# Altium PCB Right_PCB.PcbDoc
Units mm, origin at the board's own origin, x right, y up, seen from the top; angles counter-clockwise.
Board outline 207.64 x 284.48 mm, 2 copper layers (Top Layer, Bottom Layer); 88 components, 91 nets, 314 pads, 0 vias.
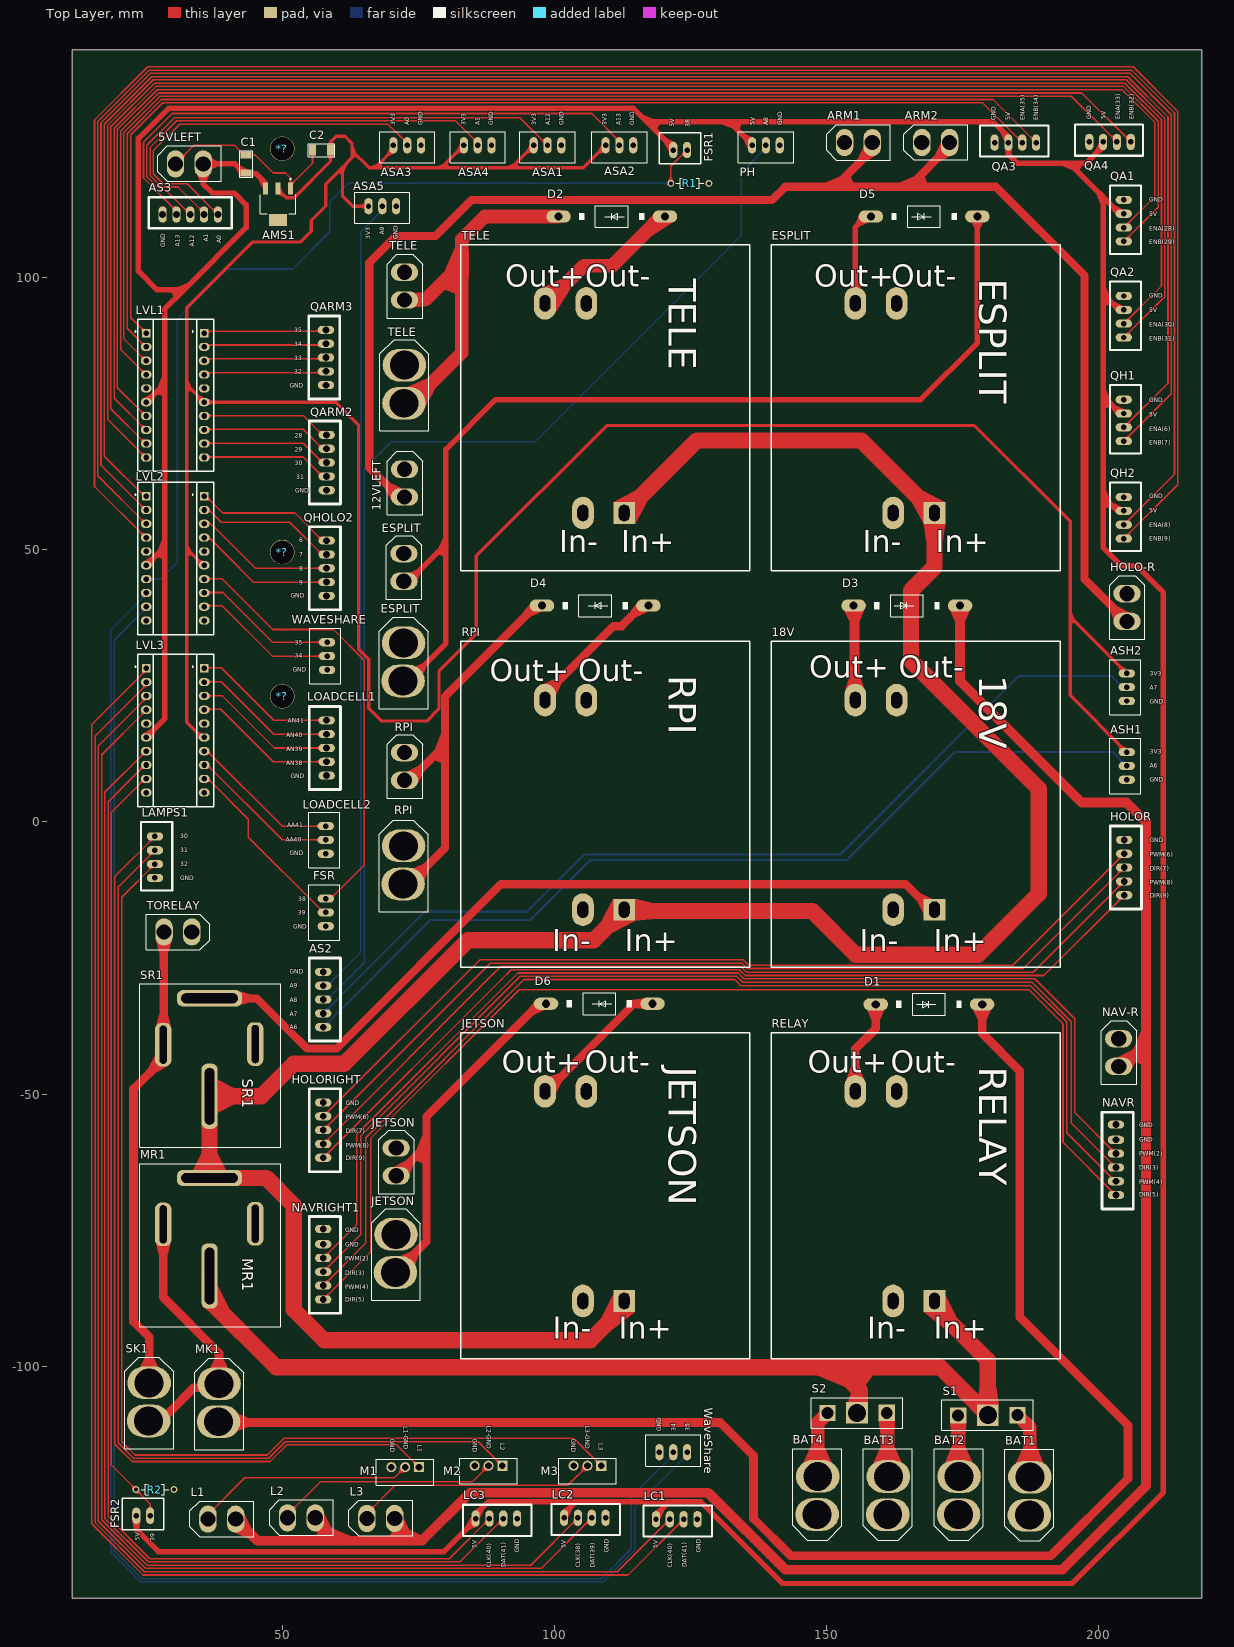
[diagram p0: Top Layer view]
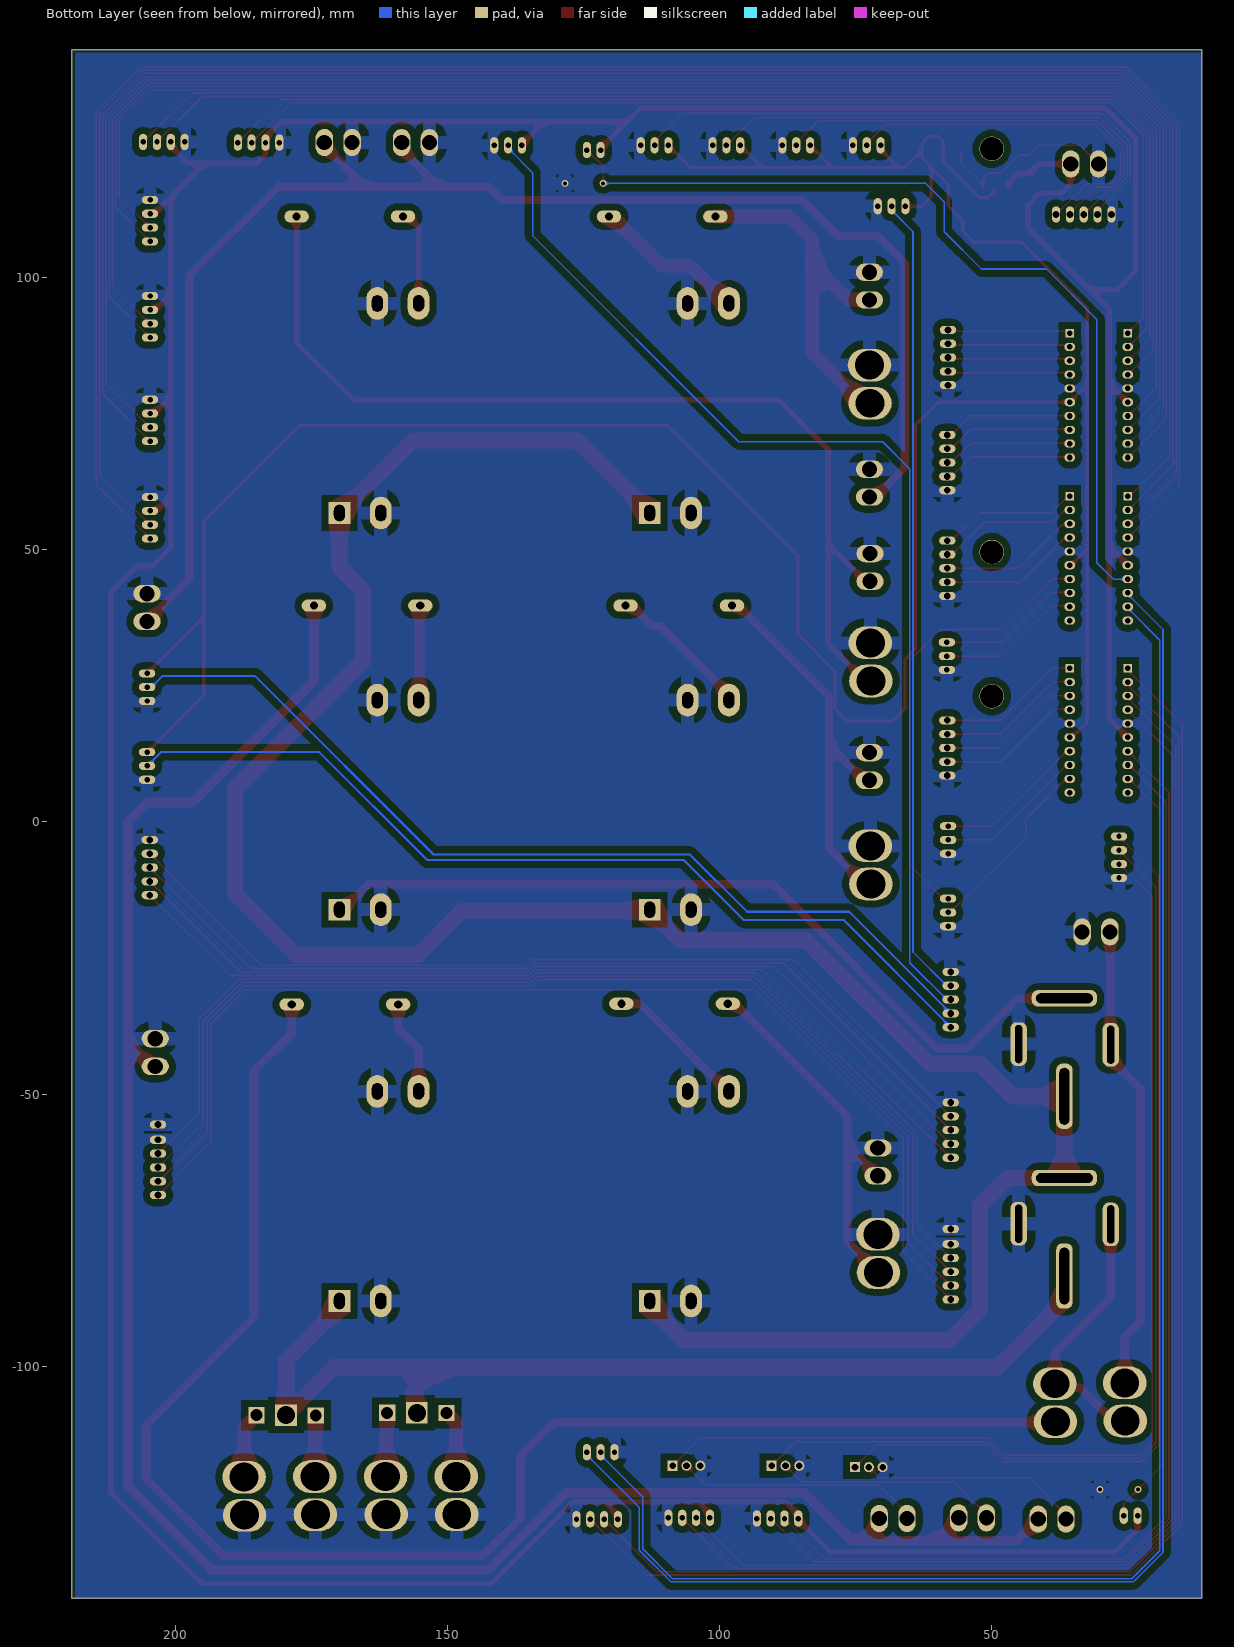
[diagram p1: Bottom Layer view, seen from below]

## Layer stack, top to bottom
Top Solder: solder mask 0.0102, Solder Resist, Dk 3.5
Top Layer: signal copper 0.0356
Dielectric 1: dielectric 0.32, FR-4, Dk 4.8
Bottom Layer: signal copper 0.0356
Bottom Solder: solder mask 0.0102, Solder Resist, Dk 3.5

## Board outline
11.303,-142.621 218.948,-142.621 218.948,141.859 11.303,141.859

## Design rules (kind name [scope] priority, off if disabled: settings)
Clearance Clearance_2 [InNet('GND') vs InComponent('LS*') or InComponent('C*') or InComponent('J1')or InComponent('J2') or InComponent('J3') or InComponent('J5') or InComponent('J6') or InComponent('U3') or InComponent('XT33') or InComponent('B2') or InComponent('R3') or InComponent('R5') OR InComponent('0')] p1: gap=1 ignorepadtopadclearanceinfootprint=FALSE
Clearance [All vs InNet('GND')] p2: gap=1.25 ignorepadtopadclearanceinfootprint=FALSE
Clearance Clearance_1 [All] p3: gap=0.3 ignorepadtopadclearanceinfootprint=FALSE
Height [All] p1: minheight=0 maxheight=50 prefheight=12.7
HoleSize [All] p1: absolutevalues=TRUE maxlimit=30 minlimit=0.025 maxpercent=80.000 minpercent=20.000
PolygonConnect [InNet('GND')] p1: connectstyle=Relief reliefconductorwidth=2.5 reliefentries=4 polygonreliefangle="90 Angle" airgapwidth=1.5
RoutingVias [All] p1: holewidth=0.711 width=1.27 viastyle="Through Hole" minholewidth=0.711 minwidth=1.27 maxholewidth=0.711 maxwidth=1.27
SolderMaskExpansion [All] p1: expansion=0.102 istentingtop=FALSE
Width [All] p1: maxlimit=6 minlimit=0.254 preferedwidth=0.3 minimp=50.000000 maximp=50.000000 favimp=50.000000
28 further rules are at their usual default settings.

## Components (designator, comment, footprint, x,y, rotation, side; value= is the part's Value field where it differs from the comment)
5VLEFT "XT30" XT30_FEMALE 32.512,120.523 r180 top
12VLEFT "XT30" XT30_FEMALE 72.009,62.611 r90 top
18V "BUCK" BUCKY 162.293,-54.719 r270 top
*? "HOLE" HOLE#1 50.038,123.825 r0 top
*? "HOLE" HOLE#2 43.053,61.468 r0 top
*? "HOLE" HOLE#3 48.768,51.181 r0 top
? "XT30" XT30_FEMALE 71.882,47.117 r90 top
AMS1 "AMS1117" AMS1117 46.644,119.217 r180 top
ARM1 "XT30" XT30_FEMALE 155.469,124.441 r180 top
ARM2 "XT30" XT30_FEMALE 169.672,124.46 r180 top
AS2 "JST5P" JST5P 57.585,-31.75 r90 top
AS3 "JST5P" JST5P 32.131,111.76 r180 top
ASA1 "JST3P" JST3P 98.552,124.079 r90 top
ASA2 "JST3P" JST3P 111.76,124.079 r90 top
ASA3 "JST3P" JST3P 72.771,124.079 r90 top
ASA4 "JST3P" JST3P 85.725,124.079 r90 top
ASA5 "JST3P" JST3P 68.199,112.903 r90 top
ASH1 "JST3P" JST3P 204.887,10.414 r0 top
ASH2 "JST3P" JST3P 204.887,24.892 r0 top
BAT1 "XT60" XT60_FEMALE 185.525,-128.496 r180 top
BAT2 "XT60" XT60_FEMALE 172.52,-128.397 r180 top
BAT3 "XT60" XT60_FEMALE 159.514,-128.397 r180 top
BAT4 "XT60" XT60_FEMALE 146.536,-128.369 r180 top
C1 "CERAMIC-4.7UF-50V-10%-X5R(1206)" C1206 43.307,120.904 r90 top
C2 "CERAMIC-4.7UF-50V-10%-X5R(1206)" C1206 57.15,123.444 r180 top
D1 "1N5400" DO201-15 168.783,-33.528 r0 top
D2 "1N5400" DO201-15 110.49,111.252 r180 top
D3 "1N5400" DO201-15 164.719,39.751 r0 top
D4 "1N5400" DO201-15 107.442,39.751 r180 top
D5 "1N5400" DO201-15 167.894,111.252 r0 top
D6 "1N5400" DO201-15 108.204,-33.401 r180 top
ESPLIT "BUCK" BUCKY 162.293,18.179 r270 top
ESPLIT "XT60" XT60_FEMALE 73.936,34.008 r0 top
FSR "JST3P" JST3P 57.689,-16.51 r0 top
FSR1 "JST2P" JST2P 122.428,124.231 r180 top
FSR2 "JST2P" JST2P 23.749,-126.746 r180 top
HOLO-R "XT30" XT30_FEMALE 204.766,39.751 r90 top
HOLOR "JST5P" JST5P 204.783,-7.493 r90 top
HOLORIGHT "JST5P" JST5P 57.585,-55.753 r90 top
JETSON "BUCK" BUCKY 105.27,-126.625 r270 top
JETSON "XT60" XT60_FEMALE 72.539,-74.704 r0 top (schematic designator JET)
L1 "XT30" XT30_FEMALE 38.481,-128.524 r180 top
L2 "XT30" XT30_FEMALE 53.107,-128.289 r180 top
L3 "XT30" XT30_FEMALE 67.691,-128.397 r180 top
LAMPS1 "JST4P" JST4P 26.543,-6.35 r0 top
LC1 "JST4P" JST4P 122.555,-128.143 r270 top
LC2 "JST4P" JST4P 105.664,-127.889 r270 top
LC3 "JST4P" JST4P 89.408,-128.016 r270 top
LOADCELL1 "JST5P" JST5P 57.966,12.7 r270 top (schematic designator LOADCELL2)
LOADCELL2 "JST3P" JST3P 57.689,-3.175 r0 top (schematic designator LOADCELL1)
LVL1 "LEVEL_SHIFTER" LEVEL_SHIFTER 23.241,64.262 r90 top
LVL2 "LEVEL_SHIFTER" LEVEL_SHIFTER 23.241,34.29 r90 top
LVL3 "LEVEL_SHIFTER" LEVEL_SHIFTER 23.241,2.667 r90 top
M1 "IRF3205" IRF3205 72.517,-119.507 r180 top
M2 "IRF3205" IRF3205 87.835,-119.253 r180 top
M3 "IRF3205" IRF3205 106.017,-119.253 r180 top
MK1 "XT60" XT60_FEMALE 40.027,-102.136 r0 top
MR1 "MAIN RELAY" RELAY 36.576,-77.199 r180 top
NAV-R "XT30" XT30_FEMALE 203.242,-42.037 r90 top
NAVR "JST6P" JST6P 203.259,-62.611 r90 top
NAVRIGHT1 "JST6P" JST6P 57.585,-81.788 r90 top (schematic designator "NAV RIGHT1")
PH "JST3P" JST3P 138.684,124.079 r90 top
QA1 "JST4P" JST4P 204.597,110.617 r0 top
QA2 "JST4P" JST4P 204.597,92.964 r0 top
QA3 "JST4P" JST4P 184.531,124.841 r90 top
QA4 "JST4P" JST4P 201.93,124.968 r90 top
QARM2 "JST5P" JST5P 57.966,65.151 r270 top
QARM3 "JST5P" JST5P 57.839,84.455 r270 top
QH1 "JST4P" JST4P 204.597,73.914 r0 top
QH2 "JST4P" JST4P 204.597,56.007 r0 top
QHOLO2 "JST5P" JST5P 57.966,45.72 r270 top
R1 "3-1623927-1" RESAD700W45L350D185 124.841,117.348 r0 top
R2 "3-1623927-1" RESAD700W45L350D185 26.543,-122.682 r0 top
RELAY "BUCK" BUCKY 162.293,-126.625 r270 top
RPI "XT60" XT60_FEMALE 73.936,-3.302 r0 top
RPI "BUCK" BUCKY 105.27,-54.719 r270 top
S1 "Schottky" "SCHOTTKY DIODE" 179.451,-109.093 r90 top
S2 "Schottky" "SCHOTTKY DIODE" 155.425,-108.658 r90 top
SK1 "XT60" XT60_FEMALE 27.178,-101.981 r0 top
SR1 "SUDO RELAY" RELAY 36.576,-44.179 r180 top
TELE "XT60" XT60_FEMALE 74.09,85.047 r0 top
TELE "BUCK" BUCKY 105.27,18.179 r270 top
TORELAY "XT30" XT30_FEMALE 31.115,-19.812 r0 top
WaveShare "JST3P" JST3P 121.92,-115.57 r270 top (schematic designator WS)
WAVESHARE "JST3P" JST3P 57.912,30.607 r0 top
? "XT30" XT30_FEMALE 72.009,10.541 r90 top
? "XT30" XT30_FEMALE 72.009,98.806 r90 top
? "XT30" XT30_FEMALE 70.466,-62.124 r90 top

## Footprints (in the part's own frame and the unit in brackets; to place one, negate y for a bottom-side part, rotate by r counter-clockwise, add the part's x,y. Pads: shape width x height; smd on the part's side, far side on the other; paste and mask are expansions set on the pad)
AMS1117 [mm]
  rect 0.95x2.15 smd: 1(-4.805,2.8) 2(-2.505,2.8) 3(-0.205,2.8)
  rect 3.25x2.15 smd: 4(-2.505,8.6)
  silkscreen extent -5.75,1 0.75,7.45, body extent -5.76,2.2 0.74,9.2, height 1.8
BUCKY [mm]
  rect 4x4 hole 3 slot 2 at 90 deg: 1(-38.59,7.506)
  oval 6x4 hole 3 slot 2 at 90 deg: 2(-38.59,-0.089) 3(-77.095,0.546) 4(-77.12,-7.049)
  silkscreen extent -87.91,-22.52 -27.97,30.57, body extent -87.75,-22.45 -27.75,30.55, height 26.51
C1206 [mil]
  rect 50x80 smd: 1(-65,0) 2(65,0)
  silkscreen extent -97,-48 97,48, body extent -63,-31 63,31, height 71
DO201-15 [mil]
  oval 177x88.5 hole 59: A(-385,0) C(385,0)
  silkscreen extent -235,-79 235,79, body extent -408,-104 408,104, height 209
HOLE#1 [mm]
  round 4.5 hole 4.3: 1(-0.127,-0.127)
HOLE#2 [mm]
  round 4.5 hole 4.3: 1(6.858,-11.878)
HOLE#3 [mm]
  round 4.5 hole 4.3: 1(1.143,-28.067)
IRF3205 [mm]
  rect 1.85x1.85 / inner round 1.85 / far side rect 1.85x1.85 hole 1.23: 1(-2.54,-0.94)
  round 1.85 hole 1.23: 2(0,-0.94) 3(2.54,-0.94)
  silkscreen extent -5.27,-2.35 5.27,2.35, body extent -5.15,-3.18 5.15,0.12, height 15.21
JST2P [mm]
  oval 1.5x3 hole 1: 1(0.635,0.762) 2(-1.905,0.762)
  silkscreen extent -4.45,-2.41 3.18,3.3, body extent -4.41,-2.4 3.14,3.3, height 7.01
JST3P [mm]
  oval 3x1.5 hole 1: 1(0.254,2.413) 2(0.254,-0.127) 3(0.254,-2.667)
  silkscreen extent -2.92,-5.21 2.79,4.95, body extent -2.9,-5.15 2.8,4.93, height 7
JST4P [mm]
  oval 3x1.5 hole 1: 1(0,3.683) 2(0,1.143) 3(0,-1.397) 4(0,-3.937)
  silkscreen extent -2.54,-6.22 3.17,6.35, body extent -2.55,-6.46 3.15,6.16, height 7
JST5P [mm]
  oval 1.5x3 hole 1.25: 1(-5.969,0.127) 2(-3.429,0.127) 3(-0.889,0.127) 4(1.651,0.127) 5(4.191,0.127)
  silkscreen extent -8.51,-3.05 6.73,2.67, body extent -8.49,-3.02 6.67,2.68, height 7
JST6P [mm]
  oval 1.5x3 hole 1.25 paste+0 mask+0.102: 1(-5.969,0.127)
  oval 1.5x3 hole 1.25: 2(-3.429,0.127) 3(-0.889,0.127) 4(1.651,0.127) 5(4.191,0.127) 6(6.985,0.127)
  silkscreen extent -8.51,-3.05 9.27,2.67, body extent -8.49,-3.02 9.21,2.68, height 7
LEVEL_SHIFTER [mm]
  oval 1.5x2 hole 1.02: GND(15.411,-12.349) GND(15.411,-1.699) HV(12.871,-1.699) HV1(2.711,-1.699) HV2(5.251,-1.699) HV3(7.791,-1.699) HV4(10.331,-1.699) HV5(17.951,-1.699) HV6(20.491,-1.699) HV7(23.031,-1.699) LV(12.871,-12.349) LV1(2.711,-12.349) LV2(5.251,-12.349) LV3(7.791,-12.349) LV4(10.331,-12.349) LV5(17.951,-12.349) LV6(20.491,-12.349) LV7(23.031,-12.349)
  rect 1.53x1.53 hole 1.02: HV8(25.571,-1.699) LV8(25.571,-12.349)
  silkscreen extent 0.14,-14.1 28.14,0.38, body extent 1.57,-13.52 26.97,-0.48, height 7.65
RELAY [mm]
  rrect75% 3x12 hole 1.8 slot 10.4 at 90 deg: 1(0,6.24)
  rrect75% 12x3 hole 1.8 slot 10.4 at 0 deg: 2(0,-11.76)
  rrect75% 3x8 hole 1.3 slot 7 at 90 deg: 3(8.52,-3.24) 4(-8.4,-3.36)
  silkscreen extent -13.08,-14.4 12.84,15.6, body extent -12.95,-14.39 12.95,15.51, height 40.91
RESAD700W45L350D185 [mm]
  round 1.258 hole 0.75: 1(-3.5,0) 2(3.5,0)
  silkscreen extent -2.55,-0.92 2.55,0.92, body extent -3.72,-0.92 3.72,0.92, height 1.84
"SCHOTTKY DIODE" [mm]
  rect 3x3 hole 2.2: 1(0.073,-5.6) 3(0.023,5.3)
  rect 4x4 hole 3.3: 2(0.073,-0.15)
  silkscreen extent -2.73,-8.5 2.87,8.3, body extent -2.46,-8.17 2.57,7.98, height 21.31
XT30_FEMALE [mm]
  oval 3.2x5 hole 2.8: 1(-2.9,-0.4) 2(2.2,-0.4)
  silkscreen extent -6.2,-3.7 5.5,2.8, body extent -5.79,-3.4 5.01,2.5, height 11.4
XT60_FEMALE [mm]
  oval 8x6 hole 5.3: 1(-1.8,-8.1) 2(-1.7,-1.1)
  silkscreen extent -6.2,-13.2 2.8,3.6, body extent -6.3,-13.1 3,3.4, height 17

## Part data
C1 C2: "4.7 ÂµF Â±10% 50V Ceramic Capacitor X5R 1206 (3216 Metric)", Package="SMD-2 Yageo", Check_prices=https://www.snapeda.com/parts/CC1206KKX5R9BB475/Yageo/view-part/?ref=eda, MF=Yageo, MP=CC1206KKX5R9BB475, SnapEDA_Link=https://www.snapeda.com/parts/CC1206KKX5R9BB475/Yageo/view-part/?ref=snap
D1 D2 D3 D4 D5 D6: "Diode Standard 50 V 3A Through Hole DO-201AD", Package="DO-201 Diodes Inc.", Check_prices=https://www.snapeda.com/parts/1N5400-T/Diodes+Inc./view-part/?ref=eda, MF="Diodes Inc.", MP=1N5400-T, SnapEDA_Link=https://www.snapeda.com/parts/1N5400-T/Diodes+Inc./view-part/?ref=snap
MR1 SR1: library part RELAY, "Power Relay SPDT 30A 24V", Manufacturer="TE Connectivity", Manufacturer Part Number=V23134A4064X551-EV-CBOX, Supplier Part Number 1=41-V23134A4064X551-EV-CBOX-ND, Pricing 1="1=21.98, 10=19.576, 25=18.6936, 50=18.0516, 110=17.34791, 330=16.41191, 550=15.99385 (USD)", RoHS=No, Stock 1=33, Supplier 1=Digikey
R1 R2: "1 MOhms Â±5% 0.25W, 1/4W Through Hole Resistor Axial - Carbon Film", Package=None, Check_prices=https://www.snapeda.com/parts/3-1623927-1/TE+Connectivity/view-part/?ref=eda, MF="TE Connectivity", MP=3-1623927-1, SnapEDA_Link=https://www.snapeda.com/parts/3-1623927-1/TE+Connectivity/view-part/?ref=snap

## Nets (pads, with @x,y where several pads share a name; then routed paths per layer and width w, separated by ;. In a path a pad name is that pad's centre, name@x,y a point inside that pad or via, vN(x,y) a via of type N, cw(c..) or ccw(c..) an arc to the next point about the centre after c; other vN are vias at no path point)
3V3: AMS1.2 ASA1.1 ASA2.1 ASA3.1 ASA4.1 ASA5.1 ASH1.1 ASH2.1 C2.1 LVL1.LV LVL2.LV LVL3.LV | length 553.6
  Top Layer w0.6: LVL3.LV 35.135,15.538 32.385,18.288 32.385,50.165 ; LVL2.LV 35.389,47.161 32.385,50.165 ; AMS1.2@49.149,116.198 50.666,114.681 52.112,114.681 58.801,121.37 C2.1 58.842,123.485 58.842,125.009 59.817,125.984 61.468,125.984 62.738,124.714 62.738,123.38 ; ASA5.1 62.865,113.157 61.023,114.998 61.023,120.332 ; ASA3.1@70.358,124.206 70.358,123.571 66.999,120.212 ; ASA4.1@82.896,123.411 ASA4.1@83.312,123.827 ; ASA4.1 79.191,120.212 ; ASA1.1 92.018,120.212 ; ASA2.1 105.226,120.212 92.018,120.212 ; ASH1.1 194.727,23.241 194.727,37.719 ; ASH2.1 194.727,37.719 ; 32.385,50.165 32.385,80.332 ; 32.385,80.332 32.385,94.488 44.45,106.553 53.213,106.553 55.245,108.585 55.245,110.52 57.912,113.187 57.912,117.221 61.023,120.332 ; 32.385,80.332 35.584,77.133 59.773,77.133 63.928,72.978 63.928,31.83 65.849,29.909 65.849,20.892 68.199,18.542 76.484,18.542 78.729,20.787 78.729,27.681 85.598,34.55 85.598,48.895 109.542,72.839 177.146,72.839 194.727,55.257 194.727,37.719 ; 61.023,120.332 62.738,122.047 62.738,123.38 ; 62.738,123.38 65.907,120.212 66.999,120.212 ; 66.999,120.212 79.191,120.212 ; 79.191,120.212 92.018,120.212
5.1V-I/P: D5.A ESPLIT.4 | length 17.7
  Top Layer w1: ESPLIT.4 155.245,109.287 157.209,111.252 D5.A
5.1V-O/P: ?.1@72.282,44.217 D5.C ESPLIT.1@72.136,25.908 | length 187.3
  Top Layer w1: ?.1@70.936,44.323 73.279,44.323 80.01,51.054 ; ESPLIT.1@72.136,25.908 73.136,25.908 80.01,32.782 80.01,51.054 ; D5.C 177.673,88.011 167.259,77.597 89.154,77.597 80.01,68.453 80.01,51.054
5V-I/P: D4.A RPI.4 | length 26.8
  Top Layer w1.5: RPI.4 98.222,23.401 110.789,35.969 112.315,35.969 116.097,39.751 D4.A
5V-O/P1: ?.1@72.409,7.641 D4.C RPI.1@72.136,-11.402 | length 73.2
  Top Layer w1.5: RPI.1@72.136,-11.402 73.241,-11.402 79.829,-4.814 79.829,14.17 ; ?.1@72.409,7.641 73.3,7.641 79.829,14.17 ; D4.C 96.539,39.751 79.829,23.041 79.829,14.17
5V-O/P2: 5VLEFT.1 AMS1.3 C1.1 FSR1.1 FSR2.1 LC1.4 LC2.4 LC3.4 LVL1.HV LVL2.HV LVL3.HV PH.1 QA1.2 QA2.2 QA3.2 QA4.2 QH1.2 QH2.2 | length 869.3
  Top Layer w1: FSR2.1 23.114,-130.048 27.178,-134.112 79.629,-134.112 84.879,-128.862 85.24,-128.862 85.567,-128.535 LC3.4@85.567,-127.92 ; LVL3.HV@24.892,15.494 28.321,18.923 28.321,50.546 ; LVL2.HV@24.892,47.117 28.321,50.546 ; LVL1.HV@24.892,77.089 28.321,80.518 ; AMS1.3@46.849,116.798 46.849,117.348 45.079,119.118 43.442,119.118 C1.1 42.926,119.253 41.256,120.923 5VLEFT.1 35.412,117.263 37.095,115.581 41.137,115.581 43.307,113.411 43.307,109.22 31.877,97.79 ; LC3.4 85.471,-127.266 87.767,-124.97 103.845,-124.97 121.037,-124.97 126.875,-124.97 141.859,-139.954 195.072,-139.954 211.836,-123.19 211.836,42.164 206.883,47.117 204.089,47.117 200.787,50.419 200.787,59.817 ; LC2.4 101.727,-127.139 103.845,-125.021 104.193,-125.021 ; LC1.4 118.618,-127.393 121.037,-124.974 ; FSR1.1 121.793,124.084 121.562,124.315 121.303,124.315 116.967,128.651 ; PH.1@136.271,124.46 132.08,128.651 ; QA4.2 200.787,124.206 197.612,121.031 194.564,121.031 ; QH2.2 204.501,57.246 203.358,57.246 200.787,59.817 ; QH1.2 203.962,75.057 200.787,78.232 ; QA2.2 203.712,94.107 203.462,94.357 203.458,94.357 200.787,97.028 ; QA1.2 204.501,111.856 203.751,111.856 201.434,114.173 201.422,114.173 200.787,114.808 ; 28.321,50.546 28.321,80.518 ; 28.321,80.518 28.321,94.234 31.877,97.79 ; 31.877,97.79 26.924,97.79 23.495,101.219 23.495,125.603 29.083,131.191 114.427,131.191 116.967,128.651 ; 116.967,128.651 132.08,128.651 ; 132.08,128.651 180.594,128.651 183.138,126.107 183.138,125.976 183.388,125.726 QA3.2 183.388,122.682 185.039,121.031 194.564,121.031 ; 194.564,121.031 200.787,114.808 ; 200.787,59.817 200.787,78.232 ; 200.787,78.232 200.787,97.028 ; 200.787,97.028 200.787,114.808
12V-O/P: 12VLEFT.1 ARM1.1 ARM2.1 HOLO-R.1 | length 279.4
  Top Layer w1.5: 12VLEFT.1 71.353,59.711 65.913,65.151 65.913,102.743 70.866,107.696 78.105,107.696 84.709,114.3 139.954,114.3 142.367,116.713 151.511,116.713 ; ARM1.1 158.369,123.571 151.511,116.713 ; ARM2.1 172.572,124.185 165.1,116.713 ; HOLO-R.1 197.358,44.659 197.358,100.457 181.102,116.713 165.1,116.713 ; 151.511,116.713 165.1,116.713
14V-I/P: D1.A RELAY.4 | length 17.5
  Top Layer w1.6: RELAY.4 155.245,-41.743 159.004,-37.984 D1.A
14V-O/P: D1.C MK1.1 | length 288.2
  Top Layer w1.6: MK1.1 38.354,-110.363 130.429,-110.363 136.525,-116.459 136.525,-128.016 143.383,-134.874 191.135,-134.874 205.359,-120.65 205.359,-110.871 185.483,-90.995 185.483,-45.783 178.562,-38.862 D1.C
18V-I/P: 18V.4 D3.A | length 17.3
  Top Layer w1.8: D3.A 155.092,39.599 18V.4@155.092,22.554
18V-O/P: D3.C L1.1 L2.1 L3.1 NAV-R.1 | length 383.8
  Top Layer w1.8: L1.1 45.337,-132.08 60.198,-132.08 ; L2.1 60.198,-132.08 ; L3.1 70.591,-128.897 73.774,-132.08 ; D3.C 174.498,25.908 196.85,3.556 205.105,3.556 208.661,0 208.661,-40.513 ; NAV-R.1 204.237,-44.937 208.661,-40.513 ; 60.198,-132.08 73.774,-132.08 ; 73.774,-132.08 75.645,-132.08 84.455,-123.27 128.223,-123.27 142.367,-137.414 193.303,-137.414 208.661,-122.056 208.661,-40.513
22V-I/P: D2.A TELE.4 | length 28.1
  Top Layer w2.5: TELE.4 98.222,95.893 98.915,96.586 99.761,96.586 105.41,102.235 110.617,102.235 119.271,110.889 D2.A@119.271,111.126
22V-O/P: ?.1@72.409,95.906 D2.C TELE.1@72.29,76.947 | length 68.1
  Top Layer w2.5: TELE.1@72.29,76.947 73.645,76.947 82.931,86.233 82.931,102.616 ; ?.1@72.409,95.906 72.543,96.04 76.355,96.04 82.931,102.616 ; D2.C 87.133,111.252 82.931,107.05 82.931,102.616
26I: LVL2.LV8 QHOLO2.1 | length 25.2
  Top Layer w0.254: QHOLO2.1@57.343,51.689 QHOLO2.1
  Top Layer w0.3: LVL2.LV8@36.322,59.69 36.322,59.442 38.992,56.772 52.26,56.772 QHOLO2.1@57.343,51.689
26O: LVL2.HV8 QH1.3 | length 334.4
  Top Layer w0.3: LVL2.HV8@24.892,59.563 17.237,67.218 17.237,128.229 25.971,136.963 205.302,136.963 212.703,129.562 212.703,80.623 QH1.3
27I: LVL2.LV7 QHOLO2.2 | length 26
  Top Layer w0.254: QHOLO2.2@57.277,49.149 QHOLO2.2
  Top Layer w0.3: LVL2.LV7@36.322,57.404 36.405,57.404 38.724,55.085 51.319,55.085 57.255,49.149 QHOLO2.2
27O: LVL2.HV7 QH1.4 | length 341.8
  Top Layer w0.3: LVL2.HV7@24.892,57.277 16.637,65.532 16.637,128.478 25.722,137.563 205.718,137.563 213.303,129.978 213.303,78.683 QH1.4
28I: LVL2.LV6 QHOLO2.3 | length 25.2
  Top Layer w0.3: LVL2.LV6@36.322,54.864 36.653,54.864 36.99,54.527 37.099,54.527 40.987,50.639 45.018,46.609 QHOLO2.3
28O: LVL2.HV6 QH2.3 | length 362.2
  Top Layer w0.3: LVL2.HV6@24.892,54.737 16.037,63.592 16.037,128.726 25.474,138.163 206.007,138.163 213.903,130.267 213.903,63.916 QH2.3
29I: LVL2.LV5 QHOLO2.4 | length 25.2
  Top Layer w0.3: LVL2.LV5@36.322,52.324 36.405,52.324 39.624,49.105 44.66,44.069 QHOLO2.4
29O: LVL2.HV5 QH2.4 | length 369.8
  Top Layer w0.3: LVL2.HV5@24.892,52.197 15.437,61.652 15.437,128.975 25.225,138.763 206.296,138.763 214.503,130.556 214.503,61.976 QH2.4
34I: LVL1.LV4 QARM2.1 | length 23.2
  Top Layer w0.3: LVL1.LV4@36.322,74.676 53.787,74.676 57.343,71.12 QARM2.1
34O: LVL1.HV4 QA1.3 | length 272.7
  Top Layer w0.3: LVL1.HV4@24.892,74.549 19.637,79.804 19.637,127.235 26.965,134.563 204.267,134.563 210.303,128.527 210.303,114.926 QA1.3
35I: LVL1.LV3 QARM2.2 | length 23.2
  Top Layer w0.3: LVL1.LV3@36.322,72.136 53.787,72.136 57.343,68.58 QARM2.2
35O: LVL1.HV3 QA1.4 | length 280.3
  Top Layer w0.3: LVL1.HV3@24.892,72.009 19.037,77.864 19.037,127.484 26.716,135.163 204.516,135.163 210.903,128.776 210.903,112.986 QA1.4
36I: LVL1.LV2 QARM2.3 | length 23.2
  Top Layer w0.3: LVL1.LV2@36.322,69.596 53.787,69.596 57.309,66.074 QARM2.3@58.059,66.074
36O: LVL1.HV2 QA2.3 | length 300.4
  Top Layer w0.3: LVL1.HV2@24.892,69.469 18.437,75.924 18.437,127.732 26.468,135.763 204.764,135.763 211.503,129.024 211.503,98.473 QA2.3
37I: LVL1.LV1 QARM2.4 | length 23.2
  Top Layer w0.3: LVL1.LV1@36.322,67.056 53.787,67.056 57.309,63.534 QARM2.4@58.059,63.534
37O: LVL1.HV1 QA2.4 | length 308
  Top Layer w0.3: LVL1.HV1@24.892,66.929 17.837,73.984 17.837,127.981 26.219,136.363 205.013,136.363 212.103,129.273 212.103,96.533 QA2.4
38I: LVL1.LV8 QARM3.1 | length 21.9
  Top Layer w0.3: LVL1.LV8@36.322,89.916 36.6,90.194 57.736,90.194 QARM3.1
38O: LVL1.HV8 QA3.3 | length 207.1
  Top Layer w0.3: LVL1.HV8@24.767,89.66 LVL1.HV8@24.892,89.535 ; LVL1.HV8 22.098,92.675 22.098,126.302 27.959,132.163 178.606,132.163 QA3.3
39I: LVL1.LV7 QARM3.2 | length 21.9
  Top Layer w0.3: LVL1.LV7@36.322,87.376 36.6,87.654 57.736,87.654 QARM3.2
39O: LVL1.HV7 QA3.4 | length 213.6
  Top Layer w0.3: LVL1.HV7@24.892,87.249 21.437,90.704 21.437,126.49 27.71,132.763 180.546,132.763 QA3.4
40I: LVL1.LV6 QARM3.3 | length 21.9
  Top Layer w0.3: LVL1.LV6@36.322,84.836 36.6,85.114 57.736,85.114 QARM3.3
40O: LVL1.HV6 QA4.3 | length 232.4
  Top Layer w0.3: LVL1.HV6@24.892,84.709 20.837,88.764 20.837,126.738 27.462,133.363 194.932,133.363 QA4.3
41I: LVL1.LV5 QARM3.4 | length 21.9
  Top Layer w0.3: LVL1.LV5@36.322,82.296 36.6,82.574 57.736,82.574 QARM3.4
41O: LVL1.HV5 QA4.4 | length 239
  Top Layer w0.3: LVL1.HV5@24.892,82.169 20.237,86.824 20.237,126.987 27.213,133.963 196.872,133.963 QA4.4
A0: AS3.1 ASA3.2 | length 69.8
  Top Layer w0.3: AS3.1 32.455,117.278 28.056,117.278 26.245,119.089 26.245,123.4 31.074,128.229 69.371,128.229 72.159,125.441 72.215,125.441 72.898,124.758 ASA3.2
A1: AS3.2 ASA4.2 | length 82.5
  Top Layer w0.3: AS3.2 35.56,111.887 30.769,116.678 27.808,116.678 25.645,118.841 25.645,123.943 30.531,128.829 81.781,128.829 85.852,124.758 ASA4.2
A4: AS2.1 ASH1.2 | length 169.7
  Bottom Layer w0.4: AS2.1 77.143,-18.034 95.504,-18.034 106.553,-6.985 153.67,-6.985 173.482,12.827 202.601,12.827 ASH1.2
A5: AS2.2 ASH2.2 | length 174.2
  Bottom Layer w0.4: AS2.2 76.127,-16.51 94.869,-16.51 105.41,-5.969 152.527,-5.969 185.293,26.797 202.36,26.797 204.392,24.765 ASH2.2
A10: AS2.3 PH.2 | length 206.6
  Bottom Layer w0.3: AS2.3 58.208,-32.639 64.989,-25.858 64.989,64.862 69.977,69.85 96.393,69.85 134.303,107.76 134.303,119.326 138.811,123.834 PH.2
A11: AS2.4 ASA5.2 | length 148.2
  Bottom Layer w0.3: AS2.4 58.208,-30.099 64.389,-23.918 64.389,108.47 68.326,112.407 ASA5.2
A12: AS3.3 ASA1.2 | length 94.5
  Top Layer w0.3: AS3.3 28.575,116.078 27.559,116.078 25.045,118.592 25.045,124.359 30.118,129.432 93.58,129.432 ASA1.2
A13: AS3.4 ASA2.2 | length 108.3
  Top Layer w0.3: AS3.4 30.48,112.308 24.445,118.343 24.445,124.902 29.718,130.175 106.795,130.175 111.887,125.083 ASA2.2
A38I: FSR.1 LVL2.LV4 | length 82.1
  Top Layer w0.3: LVL2.LV4@36.322,44.704 38.862,44.704 48.207,35.359 59.338,35.359 64.989,29.708 64.989,-7.909 58.801,-14.097 FSR.1 ; FSR.1@58.547,-14.732 FSR.1@58.562,-14.717
A38O: FSR1.2 LVL2.HV4 R1.1 | length 163.4
  Top Layer w0.3: R1.1 121.341,120.477 FSR1.2
  Bottom Layer w0.3: LVL2.HV4@24.892,44.577 LVL2.HV4@24.938,44.623 ; LVL2.HV4 24.984,44.577 27.559,44.577 30.607,47.625 30.607,92.329 39.878,101.6 51.816,101.6 58.674,108.458 58.674,113.919 62.103,117.348 R1.1
A39I: FSR.2 LVL3.LV2 | length 33.8
  Top Layer w0.254: LVL3.LV2@36.322,7.874 LVL3.LV2@36.322,8.001
  Top Layer w0.3: LVL3.LV2@36.322,7.874 43.688,0.508 43.688,-2.794 56.813,-15.919 56.813,-15.933 57.518,-16.637 FSR.2
A39O: FSR2.2 LVL3.HV2 R2.1 | length 141.1
  Top Layer w0.3: LVL3.HV2@24.892,7.874 24.646,7.874 18.542,1.77 18.542,-118.181 R2.1 23.043,-122.738 25.654,-125.349 FSR2.2
BAT5: BAT1.1 S1.1 | length 12.3
  Top Layer w2.5: S1.1 187.325,-111.294 BAT1.1
BAT6: BAT2.1 S1.3 | length 11.3
  Top Layer w2.5: S1.3 174.235,-109.154 174.235,-120.213 BAT2.1
BAT7: BAT3.1 S2.1 | length 11.8
  Top Layer w2.5: S2.1 161.17,-108.73 161.17,-120.152 BAT3.1
BAT8: BAT4.1 S2.3 | length 11.2
  Top Layer w2.5: BAT4.1@148.309,-119.095 148.309,-110.451 S2.3
D2: MR1.1 RELAY.1 S1.2 S2.2 | length 190
  Top Layer w3: MR1.1 36.576,-87.939 48.84,-100.203 151.785,-100.203 ; S2.2 156.075,-108.085 156.075,-104.493 151.785,-100.203 ; RELAY.1@170.254,-89.57 179.601,-98.917 S1.2 177.451,-106.87 177.451,-106.824 170.83,-100.203 151.785,-100.203
DH(34): HOLOR.3 HOLORIGHT.3 | length 168
  Top Layer w0.3: HOLORIGHT.3 86.668,-27.432 88.144,-25.956 134.424,-25.956 135.402,-26.934 186.105,-26.934 HOLOR.3
DH(37): HOLOR.1 HOLORIGHT.1 | length 168.1
  Top Layer w0.3: HOLORIGHT.1 90.224,-28.956 92.024,-27.156 133.927,-27.156 135,-28.229 189.889,-28.229 HOLOR.1
DN(15): NAVR.3 NAVRIGHT1.3 | length 204.2
  Top Layer w0.3: NAVRIGHT1.3 64.389,-75.746 64.389,-57.658 93.691,-28.356 133.43,-28.356 134.538,-29.464 187.706,-29.464 194.945,-36.703 194.945,-55.313 NAVR.3
DN(23): NAVR.1 NAVRIGHT1.1 | length 209.9
  Top Layer w0.3: NAVRIGHT1.1 66.167,-79.048 66.167,-58.166 93.507,-30.826 187.163,-30.826 193.421,-37.084 193.421,-58.869 NAVR.1
GND: 5VLEFT.2 12VLEFT.2 18V.2 18V.3 ?.2 AMS1.1 ARM1.2 ARM2.2 AS2.5 AS3.5 ASA1.3 ASA2.3 ASA3.3 ASA4.3 ASA5.3 ASH1.3 ASH2.3 BAT1.2 BAT2.2 BAT3.2 BAT4.2 C1.2 C2.2 ESPLIT.2 ESPLIT.3 FSR.3 HOLO-R.2 HOLOR.5 HOLORIGHT.5 JETSON.2 JETSON.3 LAMPS1.4 LC1.1 LC2.1 LC3.1 LOADCELL1.5 LOADCELL2.3 LVL1.GND LVL2.GND LVL3.GND M1.3 M2.3 M3.3 MR1.4 NAV-R.2 NAVR.5 NAVR.6 NAVRIGHT1.5 NAVRIGHT1.6 PH.3 QA1.1 QA2.1 QA3.1 QA4.1 QARM2.5 QARM3.5 QH1.1 QH2.1 QHOLO2.5 R1.2 R2.2 RELAY.2 RELAY.3 RPI.2 RPI.3 SR1.4 TELE.2 TELE.3 TORELAY.2 WaveShare.3 WAVESHARE.3 | length 35.1
  Top Layer w0.3: 5VLEFT.2 33.722,124.333 41.148,124.333 42.926,122.555 C1.2 44.958,122.555 48.26,119.253 50.546,119.253 51.449,118.35 AMS1.1@51.449,117.017 ; AMS1.1 AMS1.1@51.449,117.017 ; C2.2 55.499,121.067 AMS1.1@51.449,117.017
JETSON: ?.1@70.866,-65.024 D6.C JETSON.1@70.739,-82.804 | length 69.6
  Top Layer w1.5: JETSON.1@70.739,-82.804 76.454,-77.089 76.454,-59.436 ; ?.1@70.866,-65.024 76.454,-59.436 ; D6.C@98.425,-33.274 97.301,-33.274 76.454,-54.121 76.454,-59.436
JETSON-I/P: D6.A JETSON.4 | length 26.2
  Top Layer w1.5: JETSON.4@98.475,-49.53 114.588,-33.417 117.84,-33.417 D6.A@117.983,-33.274
L1: LAMPS1.1 M1.1 | length 174.9
  Top Layer w0.3: LAMPS1.1 19.177,-10.033 19.177,-114.346 22.363,-117.532 47.695,-117.532 50.743,-114.484 70.974,-114.484 M1.1
L1-GND: L1.2 M1.2 | length 42.2
  Top Layer w0.3: L1.2@37.333,-127.072 L1.2 36.281,-127.295 43.053,-120.523 70.561,-120.523 M1.2
L2: LAMPS1.2 M2.1 | length 186.6
  Top Layer w0.3: LAMPS1.2 19.777,-11.973 19.777,-114.098 22.611,-116.932 47.446,-116.932 50.494,-113.884 85.945,-113.884 M2.1
L2-GND: L2.2 M2.2 | length 41.3
  Top Layer w0.3: L2.2 50.907,-127.274 56.896,-121.285 58.812,-121.285 84.862,-121.285 M2.2
L3: LAMPS1.3 M3.1 | length 201.2
  Top Layer w0.3: LAMPS1.3 20.447,-13.843 20.447,-113.919 22.86,-116.332 47.198,-116.332 50.246,-113.284 103.528,-113.284 M3.1
L3-GND: L3.2 M3.2 | length 45.1
  Top Layer w0.3: L3.2 65.491,-127.097 70.668,-121.92 102.41,-121.92 M3.2
LC1I: LOADCELL1.1 LVL3.LV8 | length 25.8
  Top Layer w0.3: LVL3.LV8@36.322,28.321 38.735,28.321 48.387,18.669 LOADCELL1.1
LC1O: LC1.2 LVL3.HV8 | length 278.2
  Top Layer w0.254: LVL3.HV8@24.892,27.857 LVL3.HV8@24.892,28.194
  Top Layer w0.3: LVL3.HV8@24.892,27.857 14.942,17.907 14.942,-128.988 24.336,-138.382 113.459,-138.382 LC1.2
LC2I: LOADCELL1.3 LVL3.LV6 | length 26.5
  Top Layer w0.3: LVL3.LV6 38.945,23.158 48.514,13.589 LOADCELL1.3
LC2O: LC2.2 LVL3.HV6 | length 253.3
  Top Layer w0.254: LVL3.HV6@24.892,22.72 LVL3.HV6@24.892,23.114
  Top Layer w0.3: LVL3.HV6@24.892,22.72 16.142,13.97 16.142,-128.491 24.833,-137.182 97.514,-137.182 LC2.2
LC3I: LOADCELL2.1 LVL3.LV4 | length 27.5
  Top Layer w0.254: LVL3.LV4@36.322,12.831 LVL3.LV4@36.322,13.081
  Top Layer w0.3: LVL3.LV4@36.322,12.831 49.915,-0.762 LOADCELL2.1
LC3O: LC3.2 LVL3.HV4 | length 223.9
  Top Layer w0.254: LVL3.HV4@24.835,12.954 LVL3.HV4@24.892,12.954
  Top Layer w0.3: LVL3.HV4@24.835,12.954 17.342,5.461 17.342,-127.994 25.33,-135.982 82.585,-135.982 LC3.2
M-SW: MK1.2 MR1.3 SK1.1 | length 49.3
  Top Layer w1.6: SK1.1 27.569,-110.081 29.183,-108.467 29.201,-108.467 33.661,-104.007 37.556,-104.007 MK1.2 38.327,-97.636 28.056,-87.365 MR1.3
MR-O/P: ESPLIT.1@169.799,56.769 JETSON.1@112.776,-88.035 MR1.2 RPI.1@112.776,-16.129 SR1.1 TELE.1@112.776,56.769 | length 440.8
  Top Layer w3: JETSON.1@112.215,-89.57 106.535,-95.25 57.658,-95.25 52.07,-89.662 52.07,-70.485 47.024,-65.439 MR1.2 SR1.1 46.101,-50.419 52.07,-44.45 61.341,-44.45 84.074,-21.717 107.188,-21.717 112.776,-16.129 113.03,-16.383 147.32,-16.383 155.321,-24.384 177.8,-24.384 188.976,-13.208 188.976,6.096 165.481,29.591 165.481,42.545 169.799,46.863 169.799,56.769 169.299,57.269 169.172,57.269 156.337,70.104 126.111,70.104 TELE.1@112.776,56.769
PH(33): HOLOR.4 HOLORIGHT.4 | length 168
  Top Layer w0.3: HOLORIGHT.4 86.204,-25.356 134.672,-25.356 135.65,-26.334 184.165,-26.334 HOLOR.4
PH(36): HOLOR.2 HOLORIGHT.2 | length 168.1
  Top Layer w0.3: HOLORIGHT.2 88.446,-28.194 90.084,-26.556 134.175,-26.556 135.248,-27.629 187.949,-27.629 HOLOR.2
PN(14): NAVR.4 NAVRIGHT1.4 | length 200.9
  Top Layer w0.3: NAVRIGHT1.4 63.627,-73.968 63.627,-57.404 93.275,-27.756 133.678,-27.756 134.751,-28.829 188.214,-28.829 195.58,-36.195 195.58,-53.408 NAVR.4
PN(22): NAVR.2 NAVRIGHT1.2 | length 207.7
  Top Layer w0.254: 65.256,-58.017 65.278,-58.039 ; NAVR.2@203.019,-66.04 NAVR.2
  Top Layer w0.3: NAVRIGHT1.2 65.278,-77.397 65.278,-58.039 ; 65.256,-58.017 94.317,-28.956 133.096,-28.956 134.239,-30.099 187.452,-30.099 194.093,-36.739 194.093,-57.113 NAVR.2@203.019,-66.04
S-SW: SK1.2 SR1.3 TORELAY.1 | length 86.4
  Top Layer w1.6: SK1.2 25.478,-94.671 22.606,-91.799 22.606,-49.065 28.056,-43.615 SR1.3 28.136,-40.859 28.136,-20.291 TORELAY.1
SCK1I: LOADCELL1.2 LVL3.LV7 | length 25.8
  Top Layer w0.3: LVL3.LV7@36.322,25.781 38.735,25.781 48.387,16.129 LOADCELL1.2
SCK1O: LC1.3 LVL3.HV7 | length 271.6
  Top Layer w0.254: LVL3.HV7@24.892,25.098 LVL3.HV7@24.892,25.654
  Top Layer w0.3: LVL3.HV7@24.892,25.098 15.542,15.748 15.542,-128.739 24.585,-137.782 111.519,-137.782 LC1.3
SCK2I: LOADCELL1.4 LVL3.LV5 | length 25.8
  Top Layer w0.3: LVL3.LV5@36.322,20.701 38.608,20.701 48.26,11.049 LOADCELL1.4
SCK2O: LC2.3 LVL3.HV5 | length 246.8
  Top Layer w0.254: LVL3.HV5@24.892,20.469 LVL3.HV5@24.892,20.574
  Top Layer w0.3: LVL3.HV5@24.892,20.469 16.742,12.319 16.742,-128.242 25.082,-136.582 95.574,-136.582 LC2.3
SCK3I: LOADCELL2.2 LVL3.LV3 | length 27.5
  Top Layer w0.254: LVL3.LV3@36.322,10.291 LVL3.LV3@36.322,10.541
  Top Layer w0.3: LVL3.LV3@36.322,10.291 49.915,-3.302 LOADCELL2.2
SCK3O: LC3.3 LVL3.HV3 | length 217.5
  Top Layer w0.3: LVL3.HV3@24.892,10.414 24.646,10.414 17.942,3.71 17.942,-127.745 25.579,-135.382 80.645,-135.382 LC3.3
SR-O/P: 18V.1 SR1.2 | length 151.3
  Top Layer w1.5: SR1.2 45.246,-32.419 50.927,-38.1 54.483,-41.656 59.944,-41.656 90.16,-11.44 164.496,-11.44 18V.1@169.492,-16.436
WS34I: LVL2.LV2 WAVESHARE.2 | length 25.7
  Top Layer w0.254: LVL2.LV2@36.322,39.624 LVL2.LV2@36.449,39.751
  Top Layer w0.3: LVL2.LV2@36.449,39.751 38.862,39.751 48.133,30.48 WAVESHARE.2
WS34O: LVL2.HV2 WaveShare.2 | length 296.2
  Bottom Layer w0.3: LVL2.HV2@24.892,39.497 24.892,39.247 19.05,33.405 19.05,-133.945 24.17,-139.065 108.585,-139.065 114.081,-133.569 114.081,-124.044 121.793,-116.332 WaveShare.2
WS35I: LVL2.LV3 WAVESHARE.1 | length 25.6
  Top Layer w0.3: LVL2.LV3@36.322,42.164 38.989,42.164 48.133,33.02 WAVESHARE.1
WS35O: LVL2.HV3 WaveShare.1 | length 301.8
  Bottom Layer w0.3: LVL2.HV3@24.892,42.037 24.892,41.787 18.45,35.345 18.45,-134.193 23.922,-139.665 108.834,-139.665 114.681,-133.818 114.681,-125.984 124.333,-116.332 WaveShare.1
pads on no net: *?.1 AMS1.4 LVL2.HV1 LVL2.LV1 LVL3.HV1 LVL3.LV1

## Polygon pours and split planes (outlines as drawn)
no net on Mechanical 16 (solid): 500.253,-44.196
no net on Mechanical 16 (solid): 108.458,122.555
GND on Bottom Layer "GND_L02_P000" (solid, remove dead copper, pour order 0): 11.294,141.351 218.313,141.351 218.313,-142.612 217.678,-142.621 11.294,-142.612

## Silkscreen, mask and mechanical layers (free items; w line width, h text height)
Top Overlay:
  text "GND" at 198.585,129.108 h0.8 r90
  text "5V" at 201.252,129.108 h0.8 r90
  text "ENA(33)" at 203.919,129.108 h0.8 r90
  text "ENB(32)" at 206.431,129.108 h0.8 r90
  text "GND" at 181.059,128.981 h0.8 r90
  text "5V" at 183.726,128.981 h0.8 r90
  text "ENA(35)" at 186.393,128.981 h0.8 r90
  text "ENB(34)" at 188.905,128.981 h0.8 r90
  text "3V3" at 70.696,128.059 h0.8 r90
  text "A0" at 73.236,128.059 h0.8 r90
  text "GND" at 75.776,128.059 h0.8 r90
  text "3V3" at 83.65,128.059 h0.8 r90
  text "A1" at 86.19,128.059 h0.8 r90
  text "GND" at 88.73,128.059 h0.8 r90
  text "3V3" at 96.604,128.059 h0.8 r90
  text "A12" at 99.144,128.059 h0.8 r90
  text "GND" at 101.684,128.059 h0.8 r90
  text "3V3" at 109.558,128.059 h0.8 r90
  text "A13" at 112.098,128.059 h0.8 r90
  text "GND" at 114.638,128.059 h0.8 r90
  text "5V" at 136.736,128.059 h0.8 r90
  text "A8" at 139.276,128.059 h0.8 r90
  text "GND" at 141.816,128.059 h0.8 r90
  text "5V" at 122.004,127.711 h0.8 r90
  text "38" at 124.798,127.678 h0.8 r90
  text "GND" at 209.245,113.962 h0.8
  text "5V" at 209.245,111.295 h0.8
  text "ENA(28)" at 209.245,108.628 h0.8
  text "A9" at 68.664,107.904 h0.8 r90
  text "3V3" at 66.124,107.104 h0.8 r90
  text "GND" at 71.204,107.104 h0.8 r90
  text "A1" at 36.343,106.646 h0.8 r90
  text "A0" at 38.692,106.38 h0.8 r90
  text "ENB(29)" at 209.245,106.116 h0.8
  text "A13" at 31.136,105.713 h0.8 r90
  text "A12" at 33.739,105.713 h0.8 r90
  text "GND" at 28.405,105.58 h0.8 r90
  text "TELE" at 69.596,105.156 h1.52
  text "Out+" at 90.892,98.329 h4
  text "Out-" at 105.595,98.329 h4
  text "Out+" at 147.661,98.329 h4
  text "Out-" at 161.856,98.329 h4
  text "GND" at 209.245,96.309 h0.8
  text "5V" at 209.245,93.642 h0.8
  text "ENA(30)" at 209.245,90.975 h0.8
  text "35" at 52.151,89.959 h0.8
  text "ENB(31)" at 209.245,88.463 h0.8
  text "34" at 52.151,87.419 h0.8
  text "33" at 52.151,84.879 h0.8
  text "32" at 52.151,82.339 h0.8
  text "GND" at 51.351,79.799 h0.8
  text "GND" at 209.245,77.132 h0.8
  text "5V" at 209.245,74.465 h0.8
  text "ENA(6)" at 209.245,71.798 h0.8
  text "28" at 52.278,70.61 h0.8
  text "ENB(7)" at 209.245,69.286 h0.8
  text "29" at 52.278,68.07 h0.8
  text "30" at 52.278,65.53 h0.8
  text "31" at 52.544,62.99 h0.8
  text "GND" at 52.367,60.495 h0.8
  text "GND" at 209.245,59.479 h0.8
  text "5V" at 209.245,56.812 h0.8
  text "ENA(8)" at 209.245,54.145 h0.8
  text "ESPLIT" at 68.199,53.213 h1.52
  text "ENB(9)" at 209.245,51.633 h0.8
  text "6" at 53.077,51.351 h0.8
  text "In-" at 100.817,49.522 h4
  text "In+" at 112.247,49.522 h4
  text "In-" at 156.57,49.522 h4
  text "In+" at 170.032,49.522 h4
  text "7" at 53.077,48.747 h0.8
  text "8" at 53.077,46.144 h0.8
  text "9" at 53.077,43.54 h0.8
  text "GND" at 51.478,41.191 h0.8
  text "35" at 52.24,32.555 h0.8
  text "34" at 52.24,30.142 h0.8
  text "GND" at 51.831,27.633 h0.8
  text "3V3" at 209.339,26.84 h0.8
  text "Out+" at 146.772,26.536 h4
  text "Out-" at 163.253,26.536 h4
  text "Out+" at 88.098,25.812 h4
  text "Out-" at 104.325,25.812 h4
  text "A7" at 209.339,24.3 h0.8
  text "GND" at 209.339,21.76 h0.8
  text "AN41" at 50.945,18.204 h0.8
  text "RPI" at 70.612,16.637 h1.52
  text "AN40" at 50.678,15.6 h0.8
  text "AN39" at 50.678,12.997 h0.8
  text "3V3" at 209.339,12.489 h0.8
  text "AN38" at 50.678,10.393 h0.8
  text "A6" at 209.339,9.949 h0.8
  text "GND" at 51.478,8.044 h0.8
  text "GND" at 209.339,7.409 h0.8
  text "AA41" at 50.818,-0.973 h0.8
  text "30" at 31.158,-3.005 h0.8
  text "AA40" at 50.551,-3.612 h0.8
  text "GND" at 209.339,-3.767 h0.8
  text "31" at 31.158,-5.587 h0.8
  text "GND" at 51.351,-6.152 h0.8
  text "PWM(6)" at 209.339,-6.371 h0.8
  text "32" at 31.158,-8.17 h0.8
  text "DIR(7)" at 209.339,-8.974 h0.8
  text "GND" at 31.158,-10.752 h0.8
  text "PWM(8)" at 209.339,-11.578 h0.8
  text "DIR(9)" at 209.339,-13.927 h0.8
  text "38" at 52.875,-14.562 h0.8
  text "39" at 52.786,-17.102 h0.8
  text "GND" at 51.986,-19.642 h0.8
  text "In-" at 99.547,-23.757 h4
  text "In+" at 112.882,-23.757 h4
  text "In-" at 156.062,-23.757 h4
  text "In+" at 169.651,-23.757 h4
  text "GND" at 51.351,-27.897 h0.8
  text "A9" at 51.351,-30.501 h0.8
  text "A8" at 51.351,-33.104 h0.8
  text "A7" at 51.351,-35.708 h0.8
  text "A6" at 51.351,-38.057 h0.8
  text "Out+" at 90.257,-46.07 h4
  text "Out-" at 105.565,-46.07 h4
  text "Out+" at 146.518,-46.07 h4
  text "Out-" at 161.729,-46.07 h4
  text "GND" at 61.638,-52.027 h0.8
  text "PWM(6)" at 61.638,-54.631 h0.8
  text "JETSON" at 66.421,-56.007 h1.52
  text "GND" at 207.434,-56.091 h0.8
  text "DIR(7)" at 61.638,-57.234 h0.8
  text "GND" at 207.434,-58.758 h0.8
  text "PWM(8)" at 61.638,-59.838 h0.8
  text "PWM(2)" at 207.434,-61.362 h0.8
  text "DIR(9)" at 61.638,-62.187 h0.8
  text "DIR(3)" at 207.434,-63.965 h0.8
  text "PWM(4)" at 207.434,-66.569 h0.8
  text "DIR(5)" at 207.434,-68.918 h0.8
  text "GND" at 61.511,-75.395 h0.8
  text "GND" at 61.511,-78.062 h0.8
  text "PWM(2)" at 61.511,-80.666 h0.8
  text "DIR(3)" at 61.511,-83.269 h0.8
  text "PWM(4)" at 61.511,-85.873 h0.8
  text "DIR(5)" at 61.511,-88.222 h0.8
  text "In-" at 99.674,-95.004 h4
  text "In+" at 111.739,-95.004 h4
  text "In-" at 157.459,-95.004 h4
  text "In+" at 169.651,-95.004 h4
  text "L2-GND" at 87.546,-110.966 h0.8 r270
  text "L3-GND" at 105.58,-110.966 h0.8 r270
  text "L1-GND" at 72.306,-111.099 h0.8 r270
  text "GND" at 119.591,-111.971 h0.8 r90
  text "34" at 122.258,-111.971 h0.8 r90
  text "35" at 124.798,-111.971 h0.8 r90
  text "GND" at 69.766,-113.365 h0.8 r270
  text "GND" at 84.907,-113.365 h0.8 r270
  text "GND" at 103.068,-113.365 h0.8 r270
  text "L2" at 89.959,-114.164 h0.8 r270
  text "L3" at 108.12,-114.164 h0.8 r270
  text "L1" at 74.846,-114.431 h0.8 r270
  text "5V" at 23.706,-132.131 h0.8 r90
  text "39" at 26.5,-132.164 h0.8 r90
  text "5V" at 85.682,-133.486 h0.8 r90
  text "5V" at 102.065,-133.486 h0.8 r90
  text "5V" at 118.956,-133.486 h0.8 r90
  text "GND" at 93.528,-134.285 h0.8 r90
  text "GND" at 109.911,-134.285 h0.8 r90
  text "GND" at 126.802,-134.285 h0.8 r90
  text "DAT(41)" at 91.016,-136.951 h0.8 r90
  text "DAT(41)" at 124.29,-136.951 h0.8 r90
  text "CLK(40)" at 88.349,-137.084 h0.8 r90
  text "CLK(38)" at 104.732,-137.084 h0.8 r90
  text "DAT(39)" at 107.399,-137.084 h0.8 r90
  text "CLK(40)" at 121.623,-137.084 h0.8 r90